# EAGLE board VL6180_Sensor (EAGLE 6.5.0)
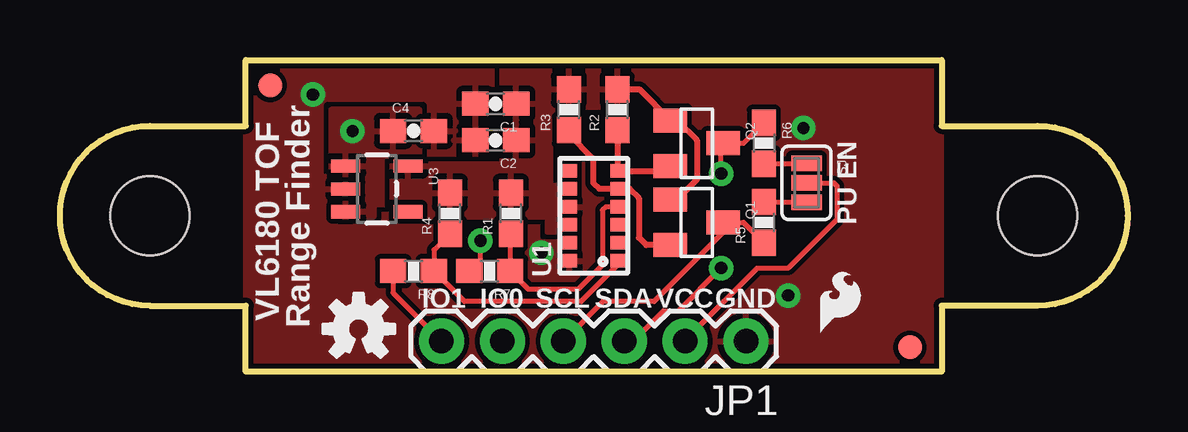
[diagram p0: board, top side]
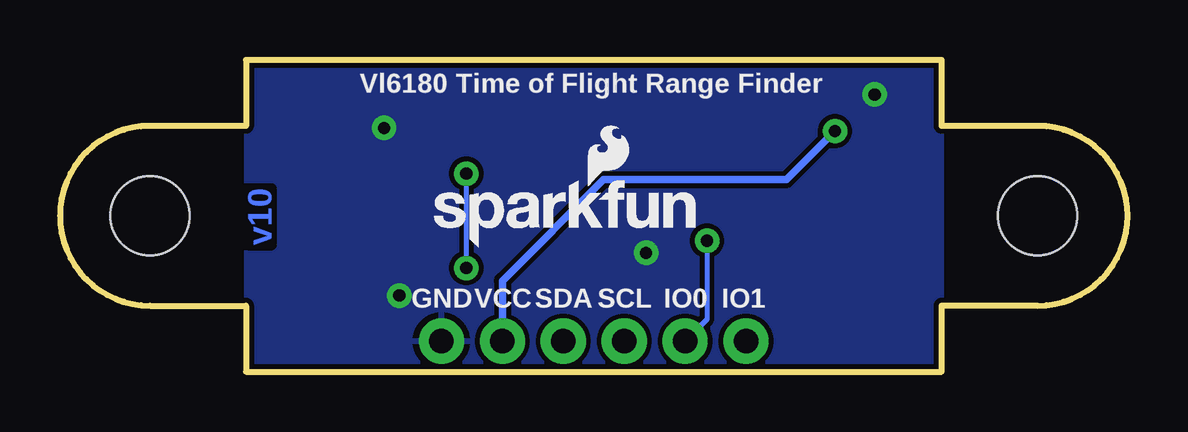
[diagram p1: board, bottom side, seen from below]

Size 44.5 x 13 mm. Coordinates in mm from the lower left corner, seen from the top.
Outline: 7.75,13 36.75,13 36.75,10.25 40.75,10.25 arc-180 40.75,2.75 36.75,2.75 36.75,0 7.75,0 7.75,2.75 3.75,2.75 arc-180 3.75,10.25 7.75,10.25 7.75,13
Copper layers (1*16): Top 0.035mm / dielectric 1.5mm / Bottom 0.035mm
Design rules "SparkFun-2-layer": minimum track width 7mil, minimum drill 15mil, track to track 8mil, track to pad 8mil, pad to pad 8mil, via to via 8mil, smd to smd 8mil, copper to edge 8mil, drill to drill 8mil, minimum pad ring 12mil, minimum via ring 10mil, stop-mask expansion 4mil, vias tented up to drill 20mil, thermal gap 10mil

## Footprints (pad centres in the part's own frame; a part is rotated, then mirrored left to right if it is on the bottom)
0603-CAP = smd 1.1 x 1: 1 -0.85,0; 2 0.85,0
FIDUCIAL-1X2 = smd 1 x 1: 1 0,0
1X06 = drill 1.016 pad 1.88: 1 0,0; 2 2.54,0; 3 5.08,0; 4 7.62,0; 5 10.16,0; 6 12.7,0
SOT23 = smd 1 x 1.4: 1 -0.95,-1.1; 2 0.95,-1.1; 3 0,1.1
0603-RES = smd 1.1 x 1: 1 -0.85,0; 2 0.85,0
PAD-JUMPER-3-NC_BY_PASTE_YES_SILK_FULL_BOX = smd 0.635 x 1.27: 1 -0.813,0; 2 0,0; 3 0.813,0
STAND-OFF = hole 3.302: 0,0
VL6180 = smd 0.55 x 0.6: 1 -1.875,-1; 2 -1.125,-1; 3 -0.375,-1; 4 0.375,-1; 5 1.125,-1; 6 1.875,-1; 7 1.875,1; 8 1.125,1; 9 0.375,1; 10 -0.375,1; 11 -1.125,1; 12 -1.875,1
SOT23-5 = smd 0.55 x 1.2: 1 -0.95,-1.3; 2 0,-1.3; 3 0.95,-1.3; 4 0.95,1.3; 5 -0.95,1.3

## Placement (x,y rotation side)
C1  4.7uF  [0603-CAP]  18.16,11.18 180 top
C2  0.1uF  [0603-CAP]  18.16,9.65 180 top
C4  0.1uF  [0603-CAP]  14.73,10.03 0 top
FID1  FIDUCIAL1X2  [FIDUCIAL-1X2]  8.77,11.94 0 top
FID2  FIDUCIAL1X2  [FIDUCIAL-1X2]  35.44,1.02 0 top
FRAME1  FRAME-LETTER  [CREATIVE_COMMONS]  7.75,-9.5 0 top  (outside the outline)
JP1  [1X06]  28.6,1.27 180 top
LOGO1  SFE_LOGO_NAME_FLAME.1_INCH  [SFE_LOGO_NAME_FLAME_.1]  29.34,5.08 0 bottom
LOGO2  OSHW-LOGOS  [OSHW-LOGO-S]  12.45,1.78 0 top
Q1  BSS138  [SOT23]  26.55,6.22 270 top
Q2  BSS138  [SOT23]  26.55,9.52 270 top
R1  47k  [0603-RES]  18.8,6.6 90 top
R2  2.2k  [0603-RES]  23.24,10.92 90 top
R3  2.2k  [0603-RES]  21.21,10.92 90 top
R4  47k  [0603-RES]  16.26,6.6 90 top
R5  2.2k  [0603-RES]  29.34,6.22 90 top
R6  2.2k  [0603-RES]  29.34,9.52 270 top
R7  10k  [0603-RES]  17.91,4.19 180 top
R8  10k  [0603-RES]  14.73,4.19 180 top
SJ1  [PAD-JUMPER-3-NC_BY_PASTE_YES_SILK_FULL_BOX]  31.12,7.87 270 top
STANDOFF1  STAND-OFF  [STAND-OFF]  3.75,6.5 0 top
STANDOFF2  STAND-OFF  [STAND-OFF]  40.75,6.5 0 top
U1  VL6180  [VL6180]  22.25,6.5 90 top
U3  MIC5219 3.3V  [SOT23-5]  13.21,7.62 270 top
U$2  [SFE_LOGO_FLAME_.1]  31.37,1.27 0 top

## Library data of the parts
C1 = SparkFun-Capacitors; PROD_ID: CAP-08280
C2 C4 = SparkFun-Capacitors; PROD_ID: CAP-00810
FID1 FID2 FRAME1 LOGO1 LOGO2 U$2 = SparkFun-Aesthetics
JP1 = SparkFun-Connectors
Q1 Q2 = SparkFun-DiscreteSemi; PROD_ID: TRANS-00830
R1 R4 = SparkFun-Resistors; PROD_ID: RES-07871
R2 R3 R5 R6 = SparkFun-Resistors; PROD_ID: RES-08272
R7 R8 = SparkFun-Resistors; PROD_ID: RES-00824
SJ1 = SparkFun-Passives
STANDOFF1 STANDOFF2 = SparkFun-Electromechanical
U1 = VL6180; PROD_ID: IC-12007
U3 = SparkFun-PowerIC; PROD_ID: VREG-09872

## Nets
2.8V: C1.1 C2.1 Q1.1 Q2.1 R1.2 R2.2 R3.2 R4.2 U1.8 U1.10 U3.5
GND: C1.2 C2.2 C4.2 JP1.1 U1.9 U1.12 U3.2
GPIO0: JP1.5 R7.2
GPIO1: JP1.6 R8.2
N$2: R6.2 SJ1.1
N$3: R5.2 SJ1.3
N$100: R1.1 R7.1 U1.4
N$103: R4.1 R8.1 U1.1
SCL: JP1.4 Q1.3 R5.1
SCL_LV: Q1.2 R3.1 U1.5
SDA: JP1.3 Q2.3 R6.1
SDA_LV: Q2.2 R2.1 U1.6
VCC: C4.1 JP1.2 SJ1.2 U3.1 U3.3

## Tracks (layer width: path | path; a pad name or v marks a point on that pad's centre or on a via)
2.8V
  Top 0.254: R2.2 24.15,11.77 Q2.1 25.72,10.47 26.55,9.65 26.55,8 25.72,7.17 Q1.1
  pour Top: 13.85,8.64 13.85,6.48 20.32,6.48 20.32,5.84 21.34,5.84 21.34,6.22 20.7,6.22 20.7,7.49 21.34,7.49 21.34,7.75 20.45,7.75 20.45,10.79 20.7,11.05 23.88,11.05 23.88,12.57 18.42,12.57 18.42,8.64
GND  (via drill 0.51)
  other vias: 30.36,3.17 10.54,11.56 30.99,10.16 20.07,4.95
  pour Top (rank 6): 7.75,13 36.75,13 36.75,0 7.75,0
  pour Bottom: 7.75,13 36.75,13 36.75,0 7.75,0
GPIO0  (via drill 0.51)
  Top 0.203: R7.2 17.53,4.66 v17.53,5.46
  Bottom 0.203: v17.53,5.46 17.53,2.18 JP1.5
GPIO1
  Top 0.203: R8.2 13.88,3.28 JP1.6
N$2
  Top 0.203: R6.2 31.11,8.67 SJ1.1
N$3
  Top 0.203: R5.2 31.11,7.07 SJ1.3
N$100
  Top 0.203: U1.4 22.75,6.87 22.61,6.73 22.61,4.44 21.59,3.43 19.52,3.43 R7.1 18.76,5.59 R1.1
N$103
  Top 0.203: U1.1 23.25,4.45 21.72,2.92 16.85,2.92 R8.1 15.58,5.08 R4.1
SCL
  Top 0.203: R5.1 28.49,6.22 Q1.3 27.65,5.8 24.77,2.92 22.63,2.92 JP1.4
SCL_LV
  Top 0.254: R3.1 21.21,9.91 22.23,8.89 22.23,7.87 22.48,7.62 22.49,7.62 U1.5 23.75,7.62 24.13,7.24 24.13,5.59 24.45,5.27 Q1.2
SDA  (via drill 0.51)
  Top 0.203: R6.1 28.49,9.52 Q2.3 27.56,9.44 v27.56,8.25 | v27.56,4.32 25.78,2.54 25.15,2.54 23.88,1.27 JP1.3
  Bottom 0.203: v27.56,4.32 v27.56,8.25
SDA_LV
  Top 0.254: R2.1 U1.6 25.45,8.37 Q2.2
VCC  (via drill 0.51)
  Top 0.203: SJ1.2 32.26,7.87 32.39,7.75 32.39,6.35 30.36,4.32 29.06,4.32 26.02,1.27 JP1.2
  Bottom 0.305: JP1.2 26.06,3.79 21.85,8 14.23,8 v12.19,10.03
  pour Top (rank 2): 11.31,8.13 12.7,8.13 12.7,6.98 11.56,6.98 11.56,6.48 13.08,6.48 13.08,6.98 14.99,6.98 14.99,10.92 11.31,10.92

## Text on the board
Bottom: v10
tPlace: PU EN | VL6180 TOF | Range Finder | IO1 | IO0 | SCL | SDA | VCC | GND
bPlace: Vl6180 Time of Flight Range Finder | IO1 | IO0 | SCL | SDA | VCC | GND
tDocu: Casey Kuhns